# Altium PCB v1_long.PcbDoc (part 1 of 4)
Units mm, origin at the board's own origin, x right, y up, seen from the top; angles counter-clockwise.
Board outline 116.27 x 185.5 mm, 2 copper layers (Top Layer, Bottom Layer); 294 components, 195 nets, 982 pads, 413 vias.
Unrouted connection lines stored in the file: 3.
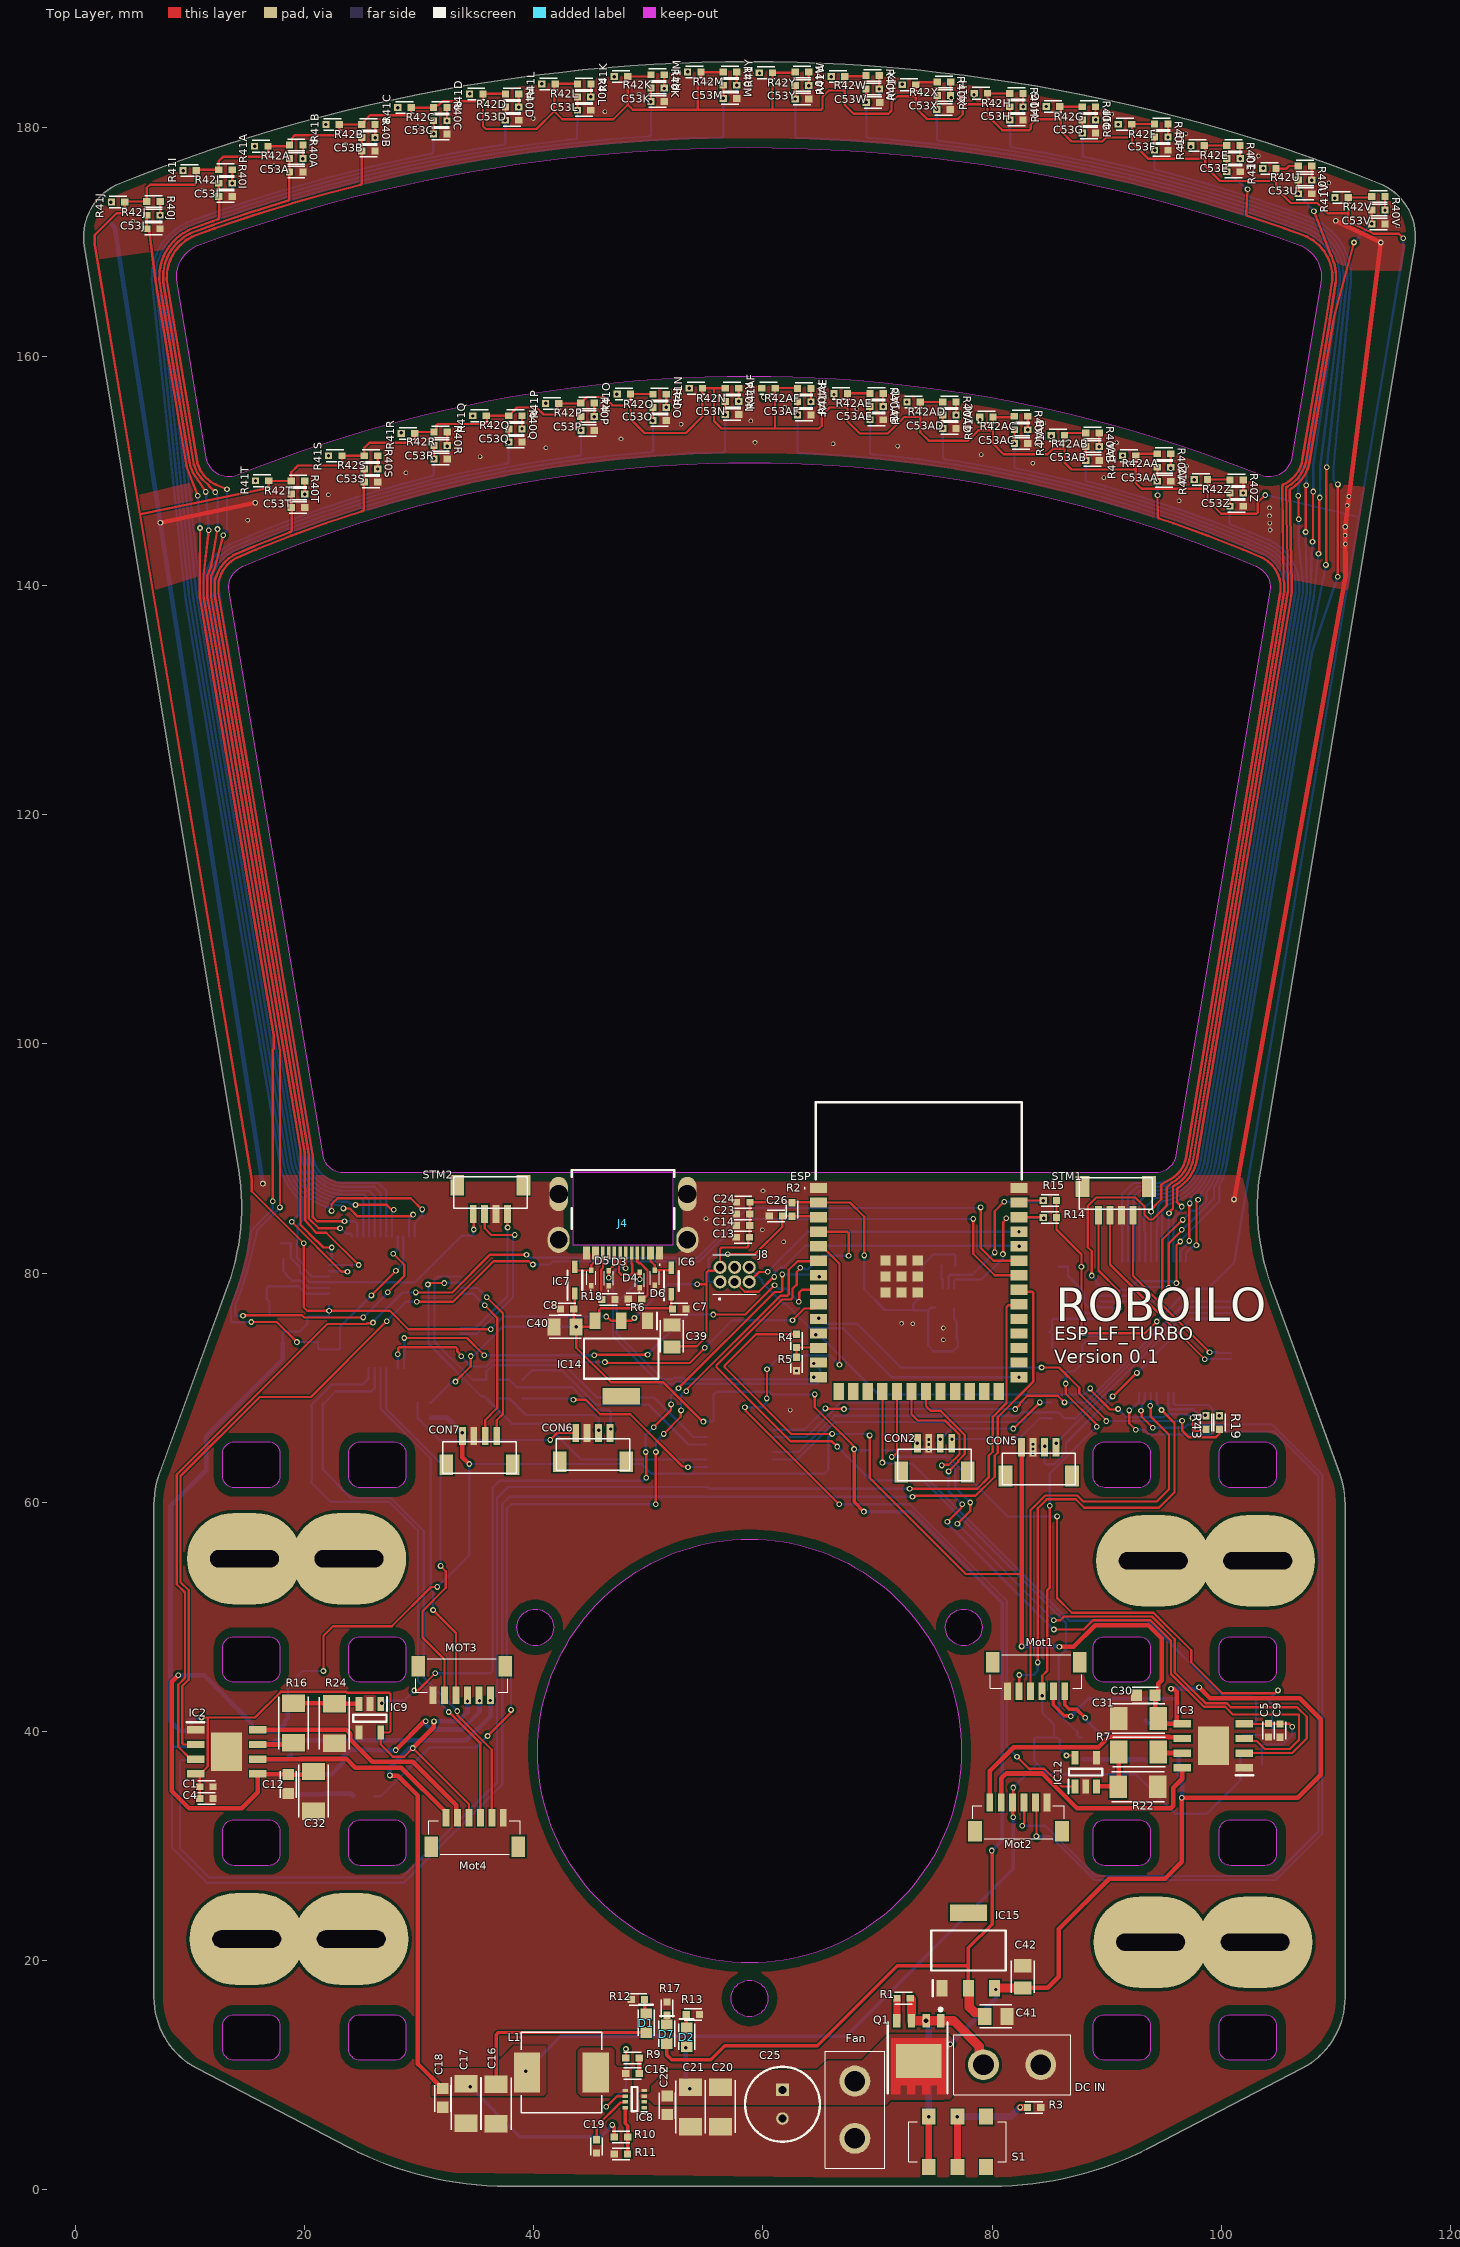
[diagram p0: Top Layer view]
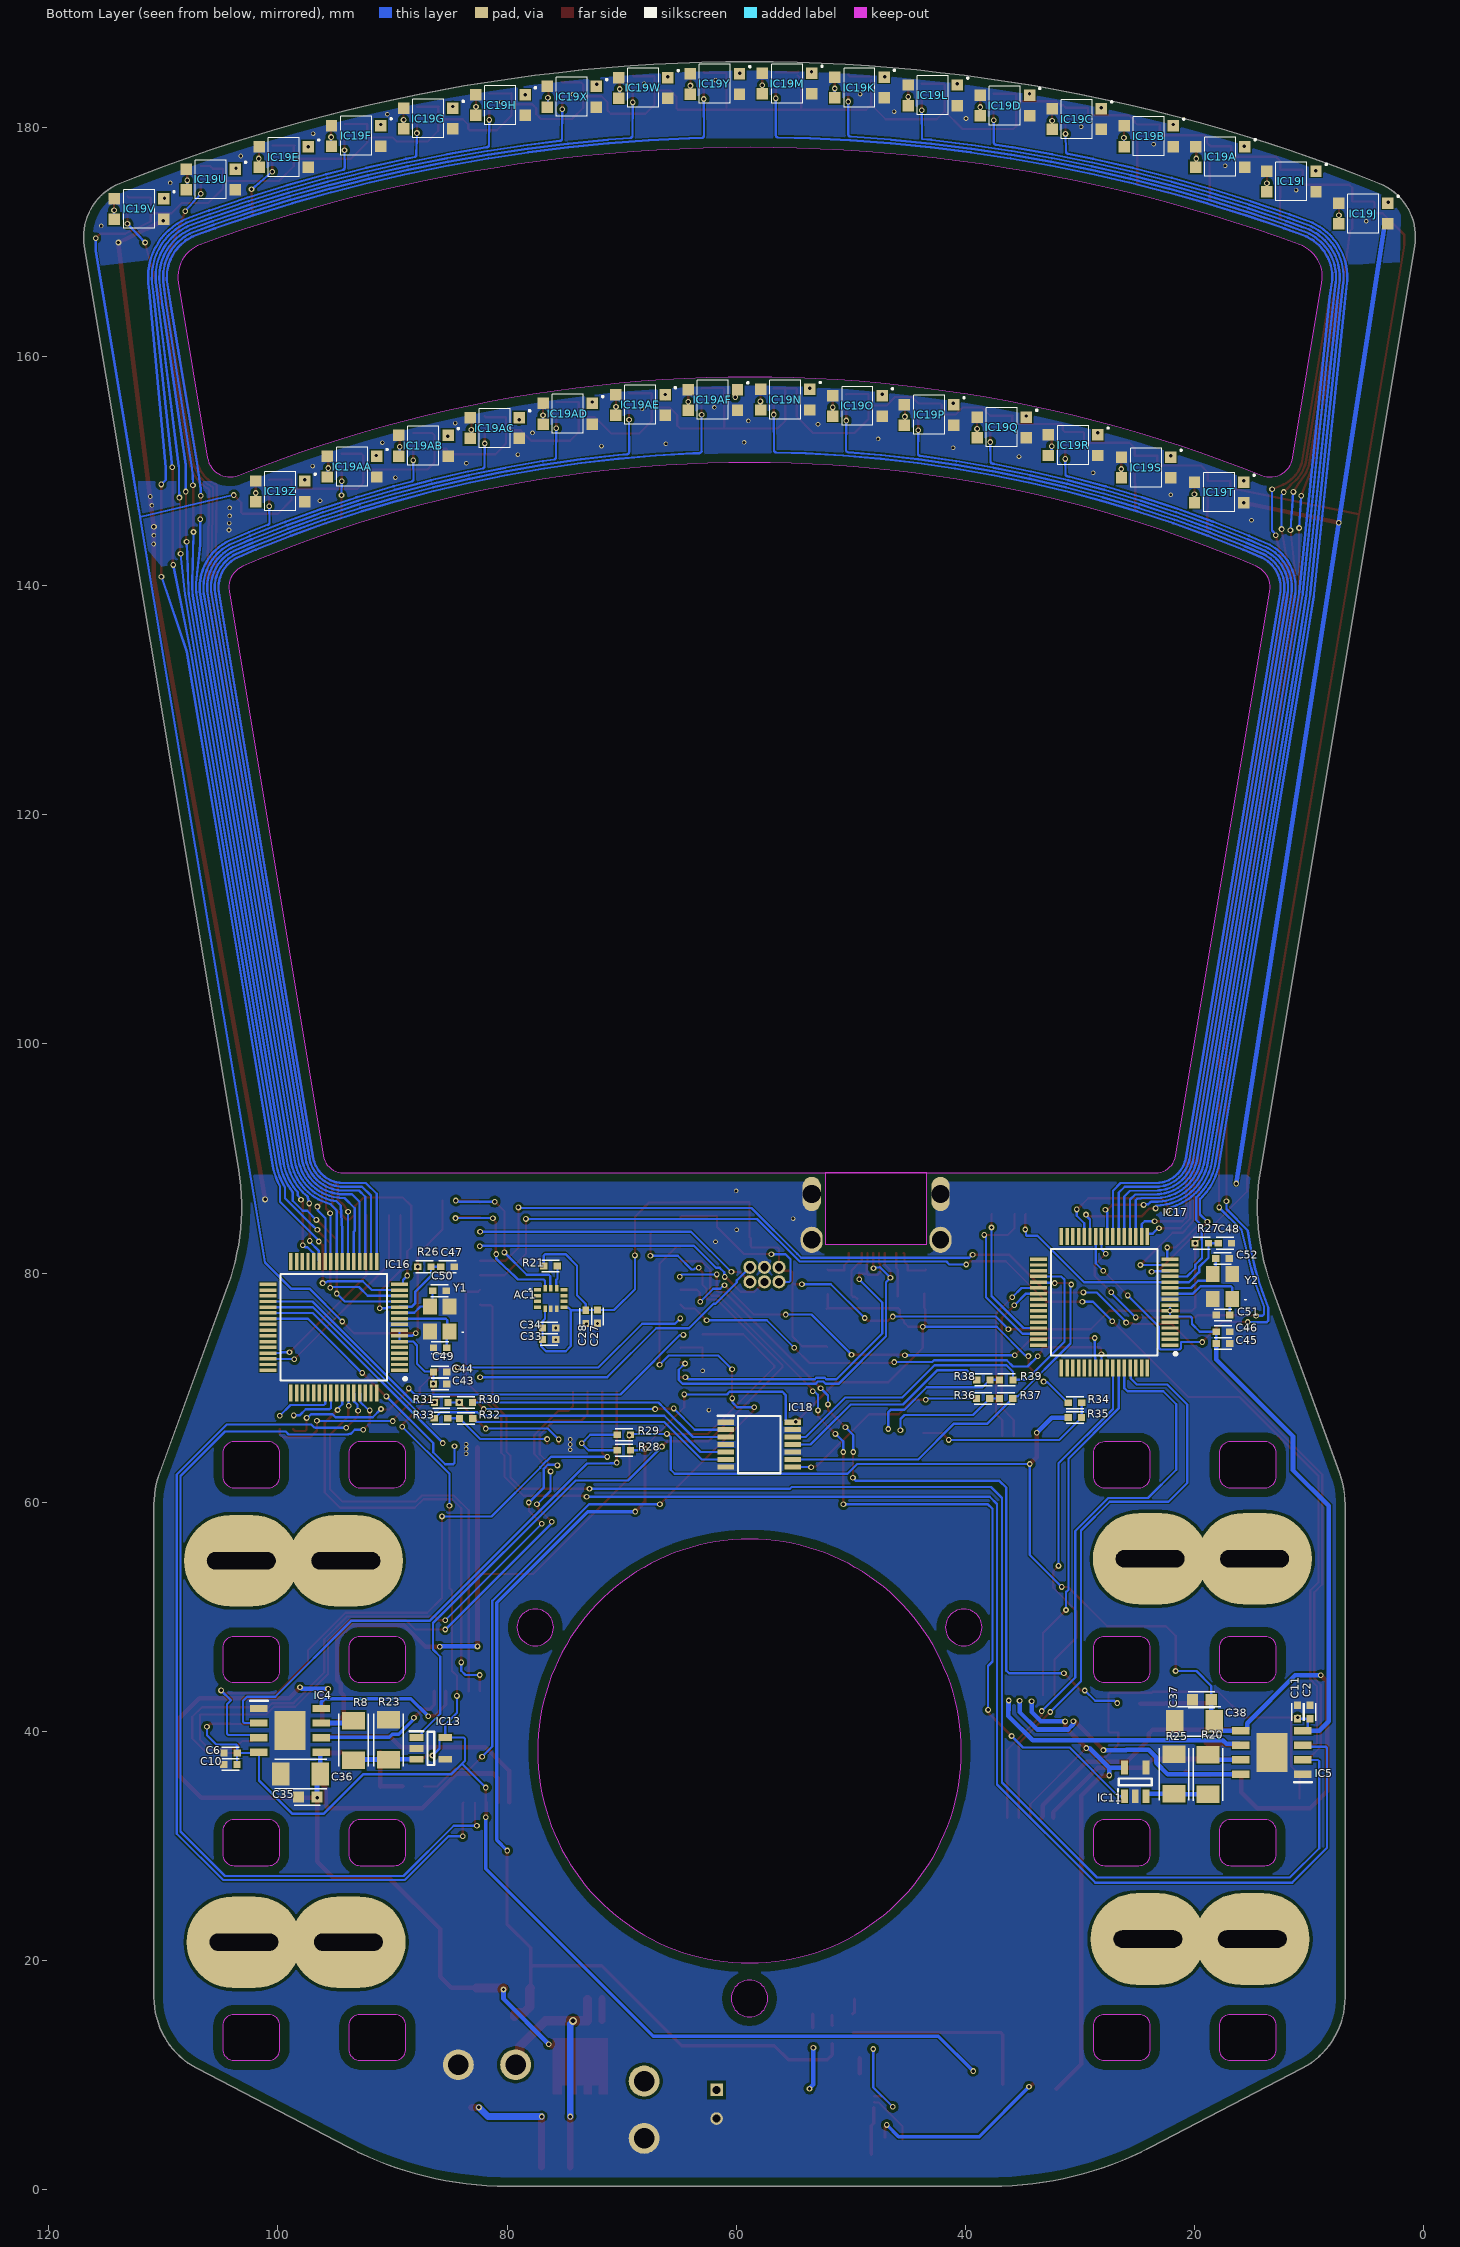
[diagram p1: Bottom Layer view, seen from below]
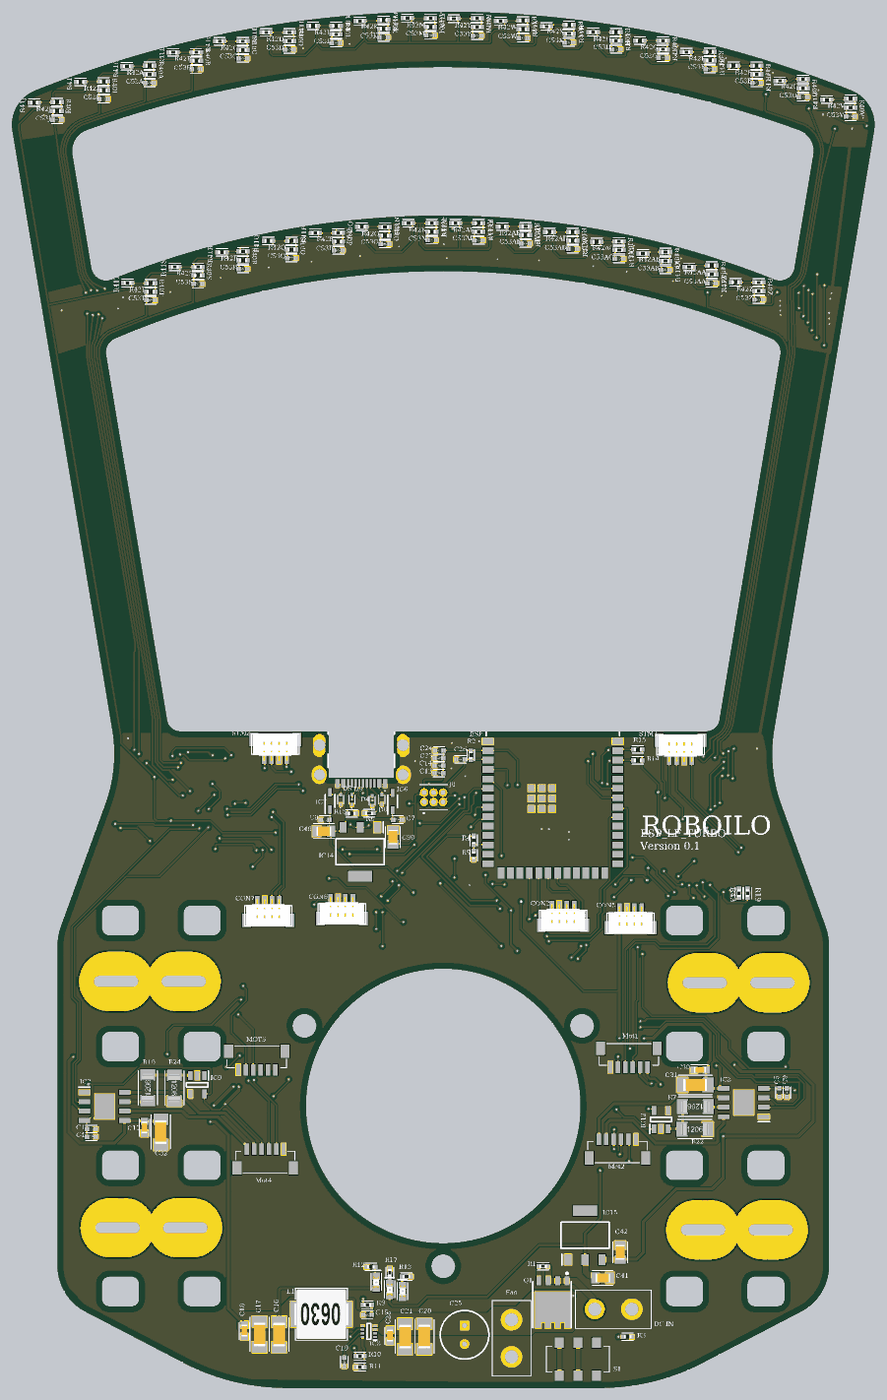
[diagram p5: 3D render of the assembled board from above, using the file's embedded part models]

## Layer stack, top to bottom
Top Solder: solder mask 0.0102, Solder Resist, Dk 3.5
Top Layer: signal copper 0.0356
Dielectric 1: dielectric 0.32, FR-4, Dk 4.8
Bottom Layer: signal copper 0.0356
Bottom Solder: solder mask 0.0102, Solder Resist, Dk 3.5

## Board outline
10.59,10.553 cw(c13.825,16.76) 6.825,16.76 6.825,59.76 cw(c14.825,59.76) 7.308,62.497 13.274,78.891 ccw(c-5.519,85.731) 14.208,89.022 0.758,169.66 cw(c5.689,170.483) 3.825,175.123 cw(c58.825,38.26) 113.825,175.123 cw(c111.961,170.483) 116.893,169.66 103.442,89.022 ccw(c123.169,85.731) 104.376,78.891 110.343,62.497 cw(c102.825,59.76) 110.825,59.76 110.825,16.76 cw(c103.825,16.76) 107.06,10.553 93.825,3.656 cw(c79.961,30.26) 79.961,0.26 37.689,0.26 cw(c37.689,30.26) 23.825,3.656
cut-out: 11.397,151.176 8.846,166.473 cw(c11.805,166.966) 10.777,169.784 cw(c58.777,38.27) 106.776,169.784 cw(c105.748,166.966) 108.707,166.473 106.156,151.176 cw(c104.183,151.505) 103.439,149.649 ccw(c58.777,38.27) 14.115,149.649 cw(c13.37,151.505)
cut-out: 21.606,90.256 13.388,139.524 cw(c15.361,139.853) 14.574,141.692 cw(c58.825,38.26) 103.076,141.692 cw(c102.289,139.853) 104.262,139.524 96.044,90.256 cw(c94.279,90.55) 94.279,88.76 23.371,88.76 cw(c23.371,90.55)
cut-out: 77.531,47.46 cw(c77.531,49.06) 75.931,49.06 cw(c77.531,49.06) 77.531,50.66 cw(c77.531,49.06) 79.131,49.06 cw(c77.531,49.06)
cut-out: 99.825,62.26 99.825,64.26 cw(c100.825,64.26) 100.825,65.26 103.825,65.26 cw(c103.825,64.26) 104.825,64.26 104.825,62.26 cw(c103.825,62.26) 103.825,61.26 100.825,61.26 cw(c100.825,62.26)
cut-out: 88.825,62.26 88.825,64.26 cw(c89.825,64.26) 89.825,65.26 92.825,65.26 cw(c92.825,64.26) 93.825,64.26 93.825,62.26 cw(c92.825,62.26) 92.825,61.26 89.825,61.26 cw(c89.825,62.26)
cut-out: 100.825,44.26 cw(c100.825,45.26) 99.825,45.26 99.825,47.26 cw(c100.825,47.26) 100.825,48.26 103.825,48.26 cw(c103.825,47.26) 104.825,47.26 104.825,45.26 cw(c103.825,45.26) 103.825,44.26
cut-out: 88.825,45.26 88.825,47.26 cw(c89.825,47.26) 89.825,48.26 92.825,48.26 cw(c92.825,47.26) 93.825,47.26 93.825,45.26 cw(c92.825,45.26) 92.825,44.26 89.825,44.26 cw(c89.825,45.26)
cut-out: 99.825,29.26 99.825,31.26 cw(c100.825,31.26) 100.825,32.26 103.825,32.26 cw(c103.825,31.26) 104.825,31.26 104.825,29.26 cw(c103.825,29.26) 103.825,28.26 100.825,28.26 cw(c100.825,29.26)
cut-out: 89.825,28.26 cw(c89.825,29.26) 88.825,29.26 88.825,31.26 cw(c89.825,31.26) 89.825,32.26 92.825,32.26 cw(c92.825,31.26) 93.825,31.26 93.825,29.26 cw(c92.825,29.26) 92.825,28.26
cut-out: 99.825,12.26 99.825,14.26 cw(c100.825,14.26) 100.825,15.26 103.825,15.26 cw(c103.825,14.26) 104.825,14.26 104.825,12.26 cw(c103.825,12.26) 103.825,11.26 100.825,11.26 cw(c100.825,12.26)
cut-out: 89.825,11.26 cw(c89.825,12.26) 88.825,12.26 88.825,14.26 cw(c89.825,14.26) 89.825,15.26 92.825,15.26 cw(c92.825,14.26) 93.825,14.26 93.825,12.26 cw(c92.825,12.26) 92.825,11.26
cut-out: 58.825,19.76 cw(c58.825,38.26) 40.325,38.26 cw(c58.825,38.26) 58.825,56.76 cw(c58.825,38.26) 77.325,38.26 cw(c58.825,38.26)
cut-out: 58.825,19.76 cw(c58.825,38.26) 40.325,38.26 cw(c58.825,38.26) 58.825,56.76 cw(c58.825,38.26) 77.325,38.26 cw(c58.825,38.26)
cut-out: 40.119,47.46 cw(c40.119,49.06) 38.519,49.06 cw(c40.119,49.06) 40.119,50.66 cw(c40.119,49.06) 41.719,49.06 cw(c40.119,49.06)
cut-out: 58.825,15.06 cw(c58.825,16.66) 57.225,16.66 cw(c58.825,16.66) 58.825,18.26 cw(c58.825,16.66) 60.425,16.66 cw(c58.825,16.66)
cut-out: 23.825,62.26 23.825,64.26 cw(c24.825,64.26) 24.825,65.26 27.825,65.26 cw(c27.825,64.26) 28.825,64.26 28.825,62.26 cw(c27.825,62.26) 27.825,61.26 24.825,61.26 cw(c24.825,62.26)
cut-out: 12.825,62.26 12.825,64.26 cw(c13.825,64.26) 13.825,65.26 16.825,65.26 cw(c16.825,64.26) 17.825,64.26 17.825,62.26 cw(c16.825,62.26) 16.825,61.26 13.825,61.26 cw(c13.825,62.26)
cut-out: 23.825,45.26 23.825,47.26 cw(c24.825,47.26) 24.825,48.26 27.825,48.26 cw(c27.825,47.26) 28.825,47.26 28.825,45.26 cw(c27.825,45.26) 27.825,44.26 24.825,44.26 cw(c24.825,45.26)
cut-out: 12.825,45.26 12.825,47.26 cw(c13.825,47.26) 13.825,48.26 16.825,48.26 cw(c16.825,47.26) 17.825,47.26 17.825,45.26 cw(c16.825,45.26) 16.825,44.26 13.825,44.26 cw(c13.825,45.26)
cut-out: 13.825,28.26 cw(c13.825,29.26) 12.825,29.26 12.825,31.26 cw(c13.825,31.26) 13.825,32.26 16.825,32.26 cw(c16.825,31.26) 17.825,31.26 17.825,29.26 cw(c16.825,29.26) 16.825,28.26
cut-out: 24.825,28.26 cw(c24.825,29.26) 23.825,29.26 23.825,31.26 cw(c24.825,31.26) 24.825,32.26 27.825,32.26 cw(c27.825,31.26) 28.825,31.26 28.825,29.26 cw(c27.825,29.26) 27.825,28.26
cut-out: 13.825,11.26 cw(c13.825,12.26) 12.825,12.26 12.825,14.26 cw(c13.825,14.26) 13.825,15.26 16.825,15.26 cw(c16.825,14.26) 17.825,14.26 17.825,12.26 cw(c16.825,12.26) 16.825,11.26
cut-out: 24.825,11.26 cw(c24.825,12.26) 23.825,12.26 23.825,14.26 cw(c24.825,14.26) 24.825,15.26 27.825,15.26 cw(c27.825,14.26) 28.825,14.26 28.825,12.26 cw(c27.825,12.26) 27.825,11.26
cut-out: 43.375,88.788 43.375,82.475 52.175,82.475 52.175,88.812

## Design rules (kind name [scope] priority, off if disabled: settings)
BoardOutlineClearance [All] p1: gap=0.8 ignorepadtopadclearanceinfootprint=FALSE
Clearance [All] p1: gap=0.127 ignorepadtopadclearanceinfootprint=TRUE except(0.2: Arc-THPad Track-THPad SMDPad-THPad; 0.254: THPad-Fill THPad-Poly THPad-Region Via-Fill Via-Poly Via-Region; 0.33: Arc-Hole Track-Hole SMDPad-Hole THPad-Hole Via-Hole Fill-Hole Poly-Hole Region-Hole; 0.5: THPad-THPad)
HoleSize [All] p1: absolutevalues=TRUE maxlimit=4 minlimit=0.02 maxpercent=80.000 minpercent=20.000
HoleToHoleClearance [All] p1: gap=0.127 allowstackedmicrovias=TRUE
PlaneClearance [All] p1: clearance=0.3
PlaneConnect PlaneConnect_1 [(HasFootprint('R 2512'))] p1: planeconnectstyle=Relief reliefexpansion=0.508 reliefentries=4 reliefconductorwidth=0.254 reliefairgap=0.254
PlaneConnect [All] p2: planeconnectstyle=Relief reliefexpansion=0.508 reliefentries=4 reliefconductorwidth=0.254 reliefairgap=0.254
PolygonConnect "Polygon Power Connection" [(HasFootprint('DFN 5x6')) OR  (HasFootprint('R 2512')) OR  IsVia OR  HasFootprint('SMD PAD')  OR  (HasFootprint('DJNR60454R5FERROCORE'))  OR  (HasFootprint ('SON50P200X200X80-9N-D')) OR (HasFootprint('SOT230P700X180-4N'))  OR    InNetClass('Power')] p1: connectstyle=Direct reliefconductorwidth=0.254 reliefentries=4 polygonreliefangle="90 Angle" airgapwidth=0.254 // Conection to high power components
PolygonConnect [All] p2: connectstyle=Direct reliefconductorwidth=0.254 reliefentries=4 polygonreliefangle="90 Angle" airgapwidth=0.254
RoutingVias [All] p1: holewidth=0.3 width=0.5 viastyle="Through Hole" minholewidth=0.2 minwidth=0.3 maxholewidth=1 maxwidth=1.27
SilkToSilkClearance [All] p1: silktosilkclearance=0.127
SolderMaskExpansion "Tented Vias" [IsVia] p1: expansion=0.102 istentingtop=TRUE
SolderMaskExpansion [All] p2: expansion=0.102 istentingtop=FALSE
Width [All] p1: maxlimit=1 minlimit=0.127 preferedwidth=0.3 minimp=50.000000 maximp=50.000000 favimp=50.000000
25 further rules are at their usual default settings.

## Classes and differential pairs
channel class Sensors: U_Sensors1 U_Sensors2 U_Sensors3 U_Sensors4 U_Sensors5 U_Sensors6 U_Sensors7 U_Sensors8 U_Sensors9 U_Sensors10 U_Sensors11 U_Sensors12 U_Sensors13 U_Sensors14 U_Sensors15 U_Sensors16 U_Sensors17 U_Sensors18 U_Sensors19 U_Sensors20 U_Sensors21 U_Sensors22 U_Sensors23 U_Sensors24 U_Sensors25 U_Sensors26 U_Sensors27 U_Sensors28 U_Sensors29 U_Sensors30 U_Sensors31 U_Sensors32
component class U_STM: C43 C44 C45 C46 C47 C48 C49 C50 C51 C52 CON1 CON3 IC16 IC17 R26 R27 Y1 Y2
component class U_STM-Interface: CON2 CON5 CON6 CON7 IC18 R28 R29 R30 R31 R32 R33 R34 R35 R36 R37 R38 R39
component class U_Sensors32: C53AF IC19AF R40AF R41AF R42AF
component class U_Sensors31: C53AE IC19AE R40AE R41AE R42AE
component class U_Sensors30: C53AD IC19AD R40AD R41AD R42AD
component class U_Sensors29: C53AC IC19AC R40AC R41AC R42AC
component class U_Sensors28: C53AB IC19AB R40AB R41AB R42AB
component class U_Sensors27: C53AA IC19AA R40AA R41AA R42AA
component class U_Sensors26: C53Z IC19Z R40Z R41Z R42Z
component class U_Sensors25: C53Y IC19Y R40Y R41Y R42Y
component class U_Sensors24: C53X IC19X R40X R41X R42X
component class U_Sensors23: C53W IC19W R40W R41W R42W
component class U_Sensors22: C53V IC19V R40V R41V R42V
component class U_Sensors21: C53U IC19U R40U R41U R42U
component class U_Sensors20: C53T IC19T R40T R41T R42T
component class U_Sensors19: C53S IC19S R40S R41S R42S
component class U_Sensors18: C53R IC19R R40R R41R R42R
component class U_Sensors17: C53Q IC19Q R40Q R41Q R42Q
component class U_Sensors16: C53P IC19P R40P R41P R42P
component class U_Sensors15: C53O IC19O R40O R41O R42O
component class U_Sensors14: C53N IC19N R40N R41N R42N
component class U_Sensors13: C53M IC19M R40M R41M R42M
component class U_Sensors12: C53L IC19L R40L R41L R42L
component class U_Sensors11: C53K IC19K R40K R41K R42K
component class U_Sensors10: C53J IC19J R40J R41J R42J
component class U_Sensors9: C53I IC19I R40I R41I R42I
component class U_Sensors8: C53H IC19H R40H R41H R42H
component class U_Sensors7: C53G IC19G R40G R41G R42G
component class U_Sensors6: C53F IC19F R40F R41F R42F
component class U_Sensors5: C53E IC19E R40E R41E R42E
component class U_Sensors4: C53D IC19D R40D R41D R42D
component class U_Sensors3: C53C IC19C R40C R41C R42C
component class U_Sensors2: C53B IC19B R40B R41B R42B
component class U_Sensors1: C53A IC19A R40A R41A R42A
component class U_Power-line: C15 C16 C17 C18 C19 C20 C21 C22 C25 C39 C40 C41 C42 IC8 IC14 IC15 J3 J5 L1 Q1 R1 R3 R9 R10 R11 S1
component class U_IMU: AC1 C27 C28 C33 C34 R21
component class U_ESP: "  " C13 C14 C23 C24 C26 D1 D2 D7 IC1 R2 R4 R5 R12 R13 R14 R15 R17 R19
component class U_ESP-Interface: C7 C8 D3 D4 D5 D6 IC6 IC7 J4 J8 R6 R18
component class U_Drivers: C1 C2 C4 C5 C6 C9 C10 C11 C12 C30 C31 C32 C35 C36 C37 C38 IC2 IC3 IC4 IC5 IC9 IC11 IC12 IC13 J1 J2 J6 J7 R7 R8 R16 R20 R22 R23 R24 R25

## Components (designator, comment, footprint, x,y, rotation, side; value= is the part's Value field where it differs from the comment)
AC1 "LSM6DSOXTR" LGA-14_1 76.175,77.775 r180 bottom
C1 "100nF" "C 0402" 11.4,35.15 r0 top
C2 "100nF" "C 0402" 9.9,41.666 r90 bottom
C4 "100nF" "C 0402" 11.4,34.125 r0 top
C5 "100nF" "C 0402" 104.125,40.075 r270 top
C6 "100nF" "C 0402" 104.125,38.1 r0 bottom
C7 "10uF" "C 0402" 52.684,76.85 r0 top
C8 "10uF" "C 0402" 42.9,76.85 r180 top
C9 "100nF" "C 0402" 105.15,40.05 r270 top
C10 "100nF" "C 0402" 104.15,37.1 r0 bottom
C11 "100nF" "C 0402" 10.975,41.666 r90 bottom
C12 "0.1uF" "C 0603" 18.55,35.387 r270 top
C13 "1uF" "C 0402" 58.241,83.125 r180 top
C14 "100nF" "C 0402" 58.25,84.15 r180 top
C15 "100nF" "C 0402" 48.6,10.125 r180 top
C16 "40uF" "C 1206" 36.7,7.45 r270 top
C17 "40uF" "C 1206" 34.075,7.475 r270 top
C18 "100nF" "C 0603" 32.025,7.975 r270 top
C19 "33nF" "C 0402" 45.475,3.75 r270 top
C20 "10uF" "C 1206" 56.275,7.2 r270 top
C21 "10uF" "C 1206" 53.675,7.175 r270 top
C22 "100nF" "C 0603" 51.65,7.325 r270 top
C23 "10uF" "C 0402" 58.25,85.15 r180 top
C24 "22uF" "C 0402" 58.275,86.175 r180 top
C25 "UVY1V101MED1TD" CAPPRD250W50D655H1250 61.7,8.675 r270 top
C26 "1uF" "C 0402" 61.125,84.975 r180 top
C27 "100nF" "C 0402" 72.1,76.191 r270 bottom
C28 "1uF" "C 0402" 73.125,76.175 r270 bottom
C30 "0.1uF" "C 0603" 93.425,43.125 r180 top
C31 "47uF" "C 1206" 92.775,41.1 r180 top
C32 "47uF" "C 1206" 20.75,34.75 r270 top
C33 "1uF" "C 0402" 76.325,74.2 r180 bottom
C34 "100nF" "C 0402" 76.325,75.2 r180 bottom
C35 "0.1uF" "C 0603" 97.4,34.25 r0 bottom
C36 "47uF" "C 1206" 98.025,36.25 r0 bottom
C37 "0.1uF" "C 0603" 19.325,42.725 r0 bottom
C38 "47uF" "C 1206" 19.975,40.85 r0 bottom
C39 "22uF" "C 0805" 52.05,74.5 r90 top
C40 "10uF" "C 0805" 42.725,75.3 r180 top
C41 "22uF" "C 0805" 80.325,15.1 r0 top
C42 "10uF" "C 0805" 82.675,18.55 r90 top
C43 "1uF" "C 0402" 85.841,70.325 r180 bottom
C44 "100nF" "C 0402" 85.841,71.35 r180 bottom
C45 "1uF" "C 0402" 17.491,73.85 r180 bottom
C46 "100nF" "C 0402" 17.491,74.875 r180 bottom
C47 "100nF" "C 0402" 85.191,80.55 r180 bottom
C48 "100nF" "C 0402" 17.325,82.6 r180 bottom
C49 "22pF" "C 0402" 85.841,73.475 r0 bottom
C50 "22pF" "C 0402" 85.9,78.45 r180 bottom
C51 "22pF" "C 0402" 17.491,76.35 r0 bottom
C52 "22pF" "C 0402" 17.525,81.275 r180 bottom
C53A "22nF" "C 0402" 19.25,176.125 r0 top (schematic designator C53)
C53AA "22nF" "C 0402" 95.009,149.125 r0 top (schematic designator C53)
C53AB "22nF" "C 0402" 88.775,150.95 r0 top (schematic designator C53)
C53AC "22nF" "C 0402" 82.534,152.425 r0 top (schematic designator C53)
C53AD "22nF" "C 0402" 76.275,153.75 r0 top (schematic designator C53)
C53AE "22nF" "C 0402" 69.925,154.5 r0 top (schematic designator C53)
C53AF "22nF" "C 0402" 63.6,154.925 r0 top (schematic designator C53)
C53B "22nF" "C 0402" 25.55,177.975 r0 top (schematic designator C53)
C53C "22nF" "C 0402" 31.825,179.45 r0 top (schematic designator C53)
C53D "22nF" "C 0402" 38.091,180.65 r0 top (schematic designator C53)
C53E "22nF" "C 0402" 101.075,176.15 r0 top (schematic designator C53)
C53F "22nF" "C 0402" 94.775,178.025 r0 top (schematic designator C53)
C53G "22nF" "C 0402" 88.45,179.525 r0 top (schematic designator C53)
C53H "22nF" "C 0402" 82.125,180.675 r0 top (schematic designator C53)
C53I "22nF" "C 0402" 13.066,173.975 r0 top (schematic designator C53)
C53J "22nF" "C 0402" 6.775,171.175 r0 top (schematic designator C53)
C53K "22nF" "C 0402" 50.8,182.275 r0 top (schematic designator C53)
C53L "22nF" "C 0402" 44.384,181.525 r0 top (schematic designator C53)
C53M "22nF" "C 0402" 57.125,182.55 r0 top (schematic designator C53)
C53N "22nF" "C 0402" 57.291,154.95 r0 top (schematic designator C53)
C53O "22nF" "C 0402" 50.975,154.425 r0 top (schematic designator C53)
C53P "22nF" "C 0402" 44.691,153.575 r0 top (schematic designator C53)
C53Q "22nF" "C 0402" 38.384,152.55 r0 top (schematic designator C53)
C53R "22nF" "C 0402" 31.85,151.075 r0 top (schematic designator C53)
C53S "22nF" "C 0402" 25.775,149.05 r0 top (schematic designator C53)
C53T "22nF" "C 0402" 19.4,146.85 r0 top (schematic designator C53)
C53U "22nF" "C 0402" 107.325,174.225 r0 top (schematic designator C53)
C53V "22nF" "C 0402" 113.725,171.6 r0 top (schematic designator C53)
C53W "22nF" "C 0402" 69.6,182.2 r0 top (schematic designator C53)
C53X "22nF" "C 0402" 75.766,181.6 r0 top (schematic designator C53)
C53Y "22nF" "C 0402" 63.4,182.5 r0 top (schematic designator C53)
C53Z "22nF" "C 0402" 101.35,146.95 r0 top (schematic designator C53)
CON2 "4 PIN" BM04B-SRSS-TB 74.975,63.625 r180 top
CON5 "4 PIN" BM04B-SRSS-TB 84.075,63.275 r180 top
CON6 "4 PIN" BM04B-SRSS-TB 45.15,64.525 r180 top
CON7 "4 PIN" BM04B-SRSS-TB 35.25,64.275 r180 top
D1 "LED BLUE" "LED 0603 BLUE" 49.8,14.5 r90 top
D2 "LED BLUE" "LED 0603 BLUE" 53.325,13.275 r90 top
D3 "LESD5D5.0CT1G" LESD5D50CT1G 46.525,79.535 r90 top
D4 "LESD5D5.0CT1G" LESD5D50CT1G 49.25,79.385 r90 top
D5 "LESD5D5.0CT1G" LESD5D50CT1G 45,79.56 r90 top
D6 "LESD5D5.0CT1G" LESD5D50CT1G 50.55,79.575 r90 top
D7 "LED BLUE" "LED 0603 BLUE" 51.6,13.525 r90 top
"DC IN" "XT30PB" XT30PB 84.25,10.875 r270 top (schematic designator J5)
ESP "ESP32-S3-WROOM-1-N16R8" ESP32S3WROOM1N16R8 73.6,82.16 r0 top (schematic designator IC1)
Fan "XT30PB" XT30PB 68.025,4.45 r180 top (schematic designator J3)
IC2 "DRV8251DDAR" SOIC127P600X170-9N 13.175,38.2 r0 top
IC3 "DRV8251DDAR" SOIC127P600X170-9N 99.325,38.725 r180 top
IC4 "DRV8251DDAR" SOIC127P600X170-9N 98.95,40.075 r180 bottom
IC5 "DRV8251DDAR" SOIC127P600X170-9N 13.225,38.125 r0 bottom
IC6 "BAT760-7" SOD2513X120N 52,79.3 r90 top
IC7 "BAT760-7" SOD2513X120N 43.575,79.375 r90 top
IC8 "TPS62933DRLR" SOTFL50P160X60-8N 48.8,7.875 r180 top
IC9 "INA180A2IDBVR" SOT95P280X145-5N 25.675,41.125 r270 top
IC11 "INA180A2IDBVR" SOT95P280X145-5N 25.15,35.575 r90 bottom
IC12 "INA180A2IDBVR" SOT95P280X145-5N 88.175,36.425 r90 top
IC13 "INA180A2IDBVR" SOT95P280X145-5N 86.65,38.5 r180 bottom
IC14 "AMS1117-3.3" SOT229P700X180-4N 47.625,72.525 r270 top
IC15 "AMS1117-5" SOT229P700X180-4N 77.935,20.85 r90 top
IC16 "STM32G070RBT6" QFP50P1200X1200X160-64N 95.125,75.262 r0 bottom
IC17 "STM32G070RBT6" QFP50P1200X1200X160-64N 27.85,77.45 r0 bottom
IC18 "MC74HCT125ADTR2G" SOP65P640X120-14N 57.975,65.025 r180 bottom
IC19A "KTIR0711S" KTIR0711S 17.725,177.45 r0 bottom (schematic designator IC19)
IC19AA "KTIR0711S" KTIR0711S 93.525,150.4 r0 bottom (schematic designator IC19)
IC19AB "KTIR0711S" KTIR0711S 87.3,152.225 r0 bottom (schematic designator IC19)
IC19AC "KTIR0711S" KTIR0711S 81.073,153.775 r0 bottom (schematic designator IC19)
IC19AD "KTIR0711S" KTIR0711S 74.7,155.025 r0 bottom (schematic designator IC19)
IC19AE "KTIR0711S" KTIR0711S 68.35,155.8 r0 bottom (schematic designator IC19)
IC19AF "KTIR0711S" KTIR0711S 62.025,156.225 r0 bottom (schematic designator IC19)
IC19B "KTIR0711S" KTIR0711S 23.975,179.25 r0 bottom (schematic designator IC19)
IC19C "KTIR0711S" KTIR0711S 30.25,180.75 r0 bottom (schematic designator IC19)
IC19D "KTIR0711S" KTIR0711S 36.525,181.925 r0 bottom (schematic designator IC19)
IC19E "KTIR0711S" KTIR0711S 99.5,177.425 r0 bottom (schematic designator IC19)
IC19F "KTIR0711S" KTIR0711S 93.175,179.275 r0 bottom (schematic designator IC19)
IC19G "KTIR0711S" KTIR0711S 86.875,180.8 r0 bottom (schematic designator IC19)
IC19H "KTIR0711S" KTIR0711S 80.573,181.975 r0 bottom (schematic designator IC19)
IC19I "KTIR0711S" KTIR0711S 11.516,175.3 r0 bottom (schematic designator IC19)
IC19J "KTIR0711S" KTIR0711S 5.25,172.5 r0 bottom (schematic designator IC19)
IC19K "KTIR0711S" KTIR0711S 49.225,183.5 r0 bottom (schematic designator IC19)
IC19L "KTIR0711S" KTIR0711S 42.825,182.825 r0 bottom (schematic designator IC19)
IC19M "KTIR0711S" KTIR0711S 55.55,183.85 r0 bottom (schematic designator IC19)
IC19N "KTIR0711S" KTIR0711S 55.716,156.25 r0 bottom (schematic designator IC19)
IC19O "KTIR0711S" KTIR0711S 49.4,155.7 r0 bottom (schematic designator IC19)
IC19P "KTIR0711S" KTIR0711S 43.15,154.925 r0 bottom (schematic designator IC19)
IC19Q "KTIR0711S" KTIR0711S 36.8,153.825 r0 bottom (schematic designator IC19)
IC19R "KTIR0711S" KTIR0711S 30.575,152.275 r0 bottom (schematic designator IC19)
IC19S "KTIR0711S" KTIR0711S 24.2,150.325 r0 bottom (schematic designator IC19)
IC19T "KTIR0711S" KTIR0711S 17.825,148.15 r0 bottom (schematic designator IC19)
IC19U "KTIR0711S" KTIR0711S 105.875,175.475 r0 bottom (schematic designator IC19)
IC19V "KTIR0711S" KTIR0711S 112.125,172.9 r0 bottom (schematic designator IC19)
IC19W "KTIR0711S" KTIR0711S 68.1,183.475 r0 bottom (schematic designator IC19)
IC19X "KTIR0711S" KTIR0711S 74.35,182.7 r0 bottom (schematic designator IC19)
IC19Y "KTIR0711S" KTIR0711S 61.85,183.825 r0 bottom (schematic designator IC19)
IC19Z "KTIR0711S" KTIR0711S 99.8,148.25 r0 bottom (schematic designator IC19)
J4 "USB4500-03-0-A" USB4500030A 47.775,85.75 r180 top
J8 "FTSH-103-01-F-D" FTSH-103-XX-YYY-D 56.255,79.23 r0 top
L1 "4.7uH" HPI0630 42.4,10.2 r180 top
Mot1 "BM06B-SRSS-TB_LF__SN_" BM06BSRSSTBLFSN 83.85,45.075 r180 top (schematic designator J7)
Mot2 "BM06B-SRSS-TB_LF__SN_" BM06BSRSSTBLFSN 82.3,32.187 r0 top (schematic designator J6)
MOT3 "BM06B-SRSS-TB_LF__SN_" BM06BSRSSTBLFSN 33.7,44.725 r180 top (schematic designator J2)
Mot4 "BM06B-SRSS-TB_LF__SN_" BM06BSRSSTBLFSN 34.825,30.85 r0 top (schematic designator J1)
Q1 "AON6403" "DFN 5x6" 73.6,11.8 r180 top
R1 "100k" "R 0402" 72.275,16.675 r0 top
R2 "10k" "R 0402" 62.525,85.541 r90 top
R3 "1k" "R 0402" 83.675,7.15 r180 top
R4 "47k" "R 0402" 62.925,74.075 r90 top
R5 "13k" "R 0402" 62.925,72.05 r90 top
R6 "10k" "R 0402" 48.825,77.725 r0 top
R7 "0.05R" "R 1206" 92.8,38.175 r180 top
R8 "0.05R" "R 1206" 93.4,39.2 r270 bottom
R9 "0" "R 0402" 48.6,11.45 r180 top
R10 "31.3K" "R 0402" 47.6,4.55 r0 top
R11 "10K" "R 0402" 47.591,3.075 r0 top
R12 "160" "R 0402" 49.075,16.575 r0 top
R13 "160" "R 0402" 53.875,15.275 r180 top
R14 "10k" "R 0402" 85.05,84.85 r0 top
R15 "10k" "R 0402" 85.05,86.325 r0 top
R16 "0.05R" "R 1206" 19,40.727 r90 top
R17 "160" "R 0402" 51.625,15.775 r270 top
R18 "10k" "R 0402" 46.5,77.7 r180 top
R19 "0" "R 0402" 99.85,66.95 r90 top
R20 "0.05R" "R 1206" 18.8,36.202 r270 bottom
R21 "0R" "R 0402" 76.2,80.625 r0 bottom
R22 "0.05R" "R 1206" 92.75,35.15 r0 top
R23 "0.05R" "R 1206" 90.35,39.25 r90 bottom
R24 "0.05R" "R 1206" 22.575,40.677 r270 top
R25 "0.05R" "R 1206" 21.775,36.25 r90 bottom
R26 "100k" "R 0402" 87.216,80.55 r0 bottom
R27 "100k" "R 0402" 19.341,82.6 r0 bottom
R28 "0" "R 0402" 69.8,64.525 r180 bottom
R29 "0" "R 0402" 69.8,65.875 r180 bottom
R30 "0" "R 0402" 83.591,68.7 r180 bottom
R31 "0" "R 0402" 85.741,68.7 r0 bottom
R32 "0" "R 0402" 83.566,67.3 r180 bottom
R33 "0" "R 0402" 85.766,67.325 r0 bottom
R34 "0" "R 0402" 30.416,68.675 r0 bottom
R35 "0" "R 0402" 30.419,67.372 r0 bottom
R36 "0" "R 0402" 38.425,69.05 r0 bottom
R37 "0" "R 0402" 36.425,69.05 r180 bottom
R38 "0" "R 0402" 38.409,70.675 r0 bottom
R39 "0" "R 0402" 36.409,70.675 r180 bottom
R40A "10k" "R 0402" 19.25,178.475 r180 top (schematic designator R40)
R40AA "10k" "R 0402" 95.016,151.525 r180 top (schematic designator R40)
R40AB "10k" "R 0402" 88.775,153.35 r180 top (schematic designator R40)
R40AC "10k" "R 0402" 82.525,154.8 r180 top (schematic designator R40)
R40AD "10k" "R 0402" 76.275,156.05 r180 top (schematic designator R40)
R40AE "10k" "R 0402" 69.925,156.8 r180 top (schematic designator R40)
R40AF "10k" "R 0402" 63.6,157.225 r180 top (schematic designator R40)
R40B "10k" "R 0402" 25.55,180.275 r180 top (schematic designator R40)
R40C "10k" "R 0402" 31.825,181.75 r180 top (schematic designator R40)
R40D "10k" "R 0402" 38.1,182.95 r180 top (schematic designator R40)
R40E "10k" "R 0402" 101.066,178.45 r180 top (schematic designator R40)
R40F "10k" "R 0402" 94.775,180.325 r180 top (schematic designator R40)
R40G "10k" "R 0402" 88.45,181.825 r180 top (schematic designator R40)
R40H "10k" "R 0402" 82.125,182.975 r180 top (schematic designator R40)
R40I "10k" "R 0402" 13.066,176.325 r180 top (schematic designator R40)
R40J "10k" "R 0402" 6.784,173.55 r180 top (schematic designator R40)
R40K "10k" "R 0402" 50.8,184.625 r180 top (schematic designator R40)
R40L "10k" "R 0402" 44.391,183.825 r180 top (schematic designator R40)
R40M "10k" "R 0402" 57.125,184.85 r180 top (schematic designator R40)
R40N "10k" "R 0402" 57.291,157.25 r180 top (schematic designator R40)
R40O "10k" "R 0402" 50.975,156.725 r180 top (schematic designator R40)
R40P "10k" "R 0402" 44.675,155.95 r180 top (schematic designator R40)
R40Q "10k" "R 0402" 38.375,154.85 r180 top (schematic designator R40)
R40R "10k" "R 0402" 31.85,153.425 r180 top (schematic designator R40)
R40S "10k" "R 0402" 25.775,151.35 r180 top (schematic designator R40)
R40T "10k" "R 0402" 19.4,149.15 r180 top (schematic designator R40)
R40U "10k" "R 0402" 107.325,176.65 r180 top (schematic designator R40)
R40V "10k" "R 0402" 113.725,174 r180 top (schematic designator R40)
R40W "10k" "R 0402" 69.575,184.55 r180 top (schematic designator R40)
R40X "10k" "R 0402" 75.8,183.975 r180 top (schematic designator R40)
R40Y "10k" "R 0402" 63.4,184.85 r180 top (schematic designator R40)
R40Z "10k" "R 0402" 101.35,149.25 r180 top (schematic designator R40)
R41A "120R" "R 0402" 16.191,178.375 r180 top (schematic designator R41)
R41AA "120R" "R 0402" 91.966,151.35 r180 top (schematic designator R41)
R41AB "120R" "R 0402" 85.741,153.15 r180 top (schematic designator R41)
R41AC "120R" "R 0402" 79.5,154.725 r180 top (schematic designator R41)
R41AD "120R" "R 0402" 73.15,156.05 r180 top (schematic designator R41)
R41AE "120R" "R 0402" 66.791,156.775 r180 top (schematic designator R41)
R41AF "120R" "R 0402" 60.475,157.25 r180 top (schematic designator R41)
R41B "120R" "R 0402" 22.425,180.275 r180 top (schematic designator R41)
R41C "120R" "R 0402" 28.7,181.75 r180 top (schematic designator R41)
R41D "120R" "R 0402" 34.966,182.95 r180 top (schematic designator R41)
R41E "120R" "R 0402" 97.95,178.45 r180 top (schematic designator R41)
R41F "120R" "R 0402" 91.6,180.3 r180 top (schematic designator R41)
R41G "120R" "R 0402" 85.325,181.85 r180 top (schematic designator R41)
R41H "120R" "R 0402" 79.025,183 r180 top (schematic designator R41)
R41I "120R" "R 0402" 9.941,176.275 r180 top (schematic designator R41)
R41J "120R" "R 0402" 3.7,173.5 r180 top (schematic designator R41)
R41K "120R" "R 0402" 47.6,184.475 r180 top (schematic designator R41)
R41L "120R" "R 0402" 41.275,183.825 r180 top (schematic designator R41)
R41M "120R" "R 0402" 54,184.875 r180 top (schematic designator R41)
R41N "120R" "R 0402" 54.141,157.25 r180 top (schematic designator R41)
R41O "120R" "R 0402" 47.85,156.75 r180 top (schematic designator R41)
R41P "120R" "R 0402" 41.591,155.925 r180 top (schematic designator R41)
R41Q "120R" "R 0402" 35.25,154.85 r180 top (schematic designator R41)
R41R "120R" "R 0402" 29,153.3 r180 top (schematic designator R41)
R41S "120R" "R 0402" 22.65,151.35 r180 top (schematic designator R41)
R41T "120R" "R 0402" 16.275,149.175 r180 top (schematic designator R41)
R41U "120R" "R 0402" 104.216,176.425 r180 top (schematic designator R41)
R41V "120R" "R 0402" 110.525,173.9 r180 top (schematic designator R41)
R41W "120R" "R 0402" 66.55,184.475 r180 top (schematic designator R41)
R41X "120R" "R 0402" 72.75,183.75 r180 top (schematic designator R41)
R41Y "120R" "R 0402" 60.25,184.8 r180 top (schematic designator R41)
R41Z "120R" "R 0402" 98.225,149.275 r180 top (schematic designator R41)
R42A "8k" "R 0402" 19.25,177.3 r0 top (schematic designator R42)
R42AA "8k" "R 0402" 95.016,150.35 r0 top (schematic designator R42)
R42AB "8k" "R 0402" 88.775,152.15 r0 top (schematic designator R42)
R42AC "8k" "R 0402" 82.534,153.625 r0 top (schematic designator R42)
R42AD "8k" "R 0402" 76.275,154.9 r0 top (schematic designator R42)
R42AE "8k" "R 0402" 69.916,155.65 r0 top (schematic designator R42)
R42AF "8k" "R 0402" 63.6,156.075 r0 top (schematic designator R42)
R42B "8k" "R 0402" 25.55,179.125 r0 top (schematic designator R42)
R42C "8k" "R 0402" 31.825,180.6 r0 top (schematic designator R42)
R42D "8k" "R 0402" 38.1,181.8 r0 top (schematic designator R42)
R42E "8k" "R 0402" 101.075,177.3 r0 top (schematic designator R42)
R42F "8k" "R 0402" 94.775,179.175 r0 top (schematic designator R42)
R42G "8k" "R 0402" 88.45,180.675 r0 top (schematic designator R42)
R42H "8k" "R 0402" 82.125,181.825 r0 top (schematic designator R42)
R42I "8k" "R 0402" 13.066,175.15 r0 top (schematic designator R42)
R42J "8k" "R 0402" 6.775,172.35 r0 top (schematic designator R42)
R42K "8k" "R 0402" 50.8,183.45 r0 top (schematic designator R42)
R42L "8k" "R 0402" 44.384,182.675 r0 top (schematic designator R42)
R42M "8k" "R 0402" 57.125,183.7 r0 top (schematic designator R42)
R42N "8k" "R 0402" 57.291,156.1 r0 top (schematic designator R42)
R42O "8k" "R 0402" 50.975,155.575 r0 top (schematic designator R42)
R42P "8k" "R 0402" 44.675,154.775 r0 top (schematic designator R42)
R42Q "8k" "R 0402" 38.375,153.7 r0 top (schematic designator R42)
R42R "8k" "R 0402" 31.85,152.25 r0 top (schematic designator R42)
R42S "8k" "R 0402" 25.775,150.2 r0 top (schematic designator R42)
R42T "8k" "R 0402" 19.4,148 r0 top (schematic designator R42)
R42U "8k" "R 0402" 107.325,175.425 r0 top (schematic designator R42)
R42V "8k" "R 0402" 113.725,172.8 r0 top (schematic designator R42)
R42W "8k" "R 0402" 69.575,183.375 r0 top (schematic designator R42)
R42X "8k" "R 0402" 75.791,182.8 r0 top (schematic designator R42)
R42Y "8k" "R 0402" 63.4,183.675 r0 top (schematic designator R42)
R42Z "8k" "R 0402" 101.35,148.1 r0 top (schematic designator R42)
R43 "0" "R 0402" 98.675,66.95 r90 top
S1 "CL-SB-22B-01T" CLSB22B01T 76.975,4.15 r0 top
STM1 "4 PIN" BM04B-SRSS-TB 90.8,86.55 r0 top (schematic designator CON1)
STM2 "4 PIN" BM04B-SRSS-TB 36.2,86.65 r0 top (schematic designator CON3)
Y1 "MCSJK-7U-16.00-12-30-80-B-30" MCSJK7U1600123080B30 85.875,75.975 r90 bottom
Y2 "MCSJK-7U-16.00-12-30-80-B-30" MCSJK7U1600123080B30 17.525,78.825 r90 bottom

## Footprints (in the part's own frame and the unit in brackets; to place one, negate y for a bottom-side part, rotate by r counter-clockwise, add the part's x,y. Pads: shape width x height; smd on the part's side, far side on the other; paste and mask are expansions set on the pad)
BM04B-SRSS-TB [mm]
  rect 0.6x1.6 smd: 1(-1.5,-1.5) 2(-0.5,-1.5) 3(0.5,-1.5) 4(1.5,-1.5)
  rect 1.2x1.8 smd: A(-2.9,1) B(2.9,1)
  silkscreen extent -3.2,-1 3.2,1.75, body extent -3,-1.9 3,1.7, height 4.25
BM06BSRSSTBLFSN [mm]
  rect 0.6x1.55 smd: 1(-2.5,1.588) 2(-1.5,1.588) 3(-0.5,1.588) 4(0.5,1.588) 5(1.5,1.588) 6(2.5,1.588)
  rect 1.2x1.8 smd: 7(-3.8,-0.937) 8(3.8,-0.937)
  silkscreen extent -4,-1.59 4,1.31, body extent -4,-1.54 4,2.06, height 4.3
"C 0402" [mm] "MLCC Capacitor 0402"
  rect 0.635x0.6 smd: 1(-0.584,0) 2(0.584,0)
  silkscreen extent -0.76,-0.51 0.76,0.51, body extent -0.76,-0.25 0.74,0.25, height 0.35
"C 0603" [mil]
  rect 38x39.37 smd: 1(-32,0) 2(32,0)
  silkscreen extent -43,-28 47,28, body extent -31,-16 31,16, height 24
"C 0805" [mil]
  rect 45x59.06 smd: 1(-38,0) 2(38,0)
  silkscreen extent -55,-39 55,39, body extent -39,-25 39,25, height 49
"C 1206" [mil]
  rect 60x78.74 smd: 1(-68,0) 2(68,0)
  silkscreen extent -91,-51 89,51, body extent -63,-31 63,31, height 59
CAPPRD250W50D655H1250 [mm]
  rect 1.1x1.1 hole 0.7: 1(0,0)
  round 1.1 hole 0.7: 2(2.5,0)
  silkscreen extent -2.02,-3.27 4.52,3.27, body extent -2.15,-3.4 4.65,3.4, height 12.5
CLSB22B01T [mm]
  rect 1.2x1.4 smd: 1(-2.5,-2.2) 2(0,-2.2) 3(2.5,-2.2) 4(-2.5,2.2) 5(0,2.2) 6(2.5,2.2)
  silkscreen extent -4.25,-1.75 4.25,1.75, body extent -4.25,-2.78 4.25,2.78, height 5.6
"DFN 5x6" [mm]
  rect 0.65x1.2 smd: 1(-1.905,-2.91) 2(-0.635,-2.91) 3(0.635,-2.91) 4(1.905,-2.91)
  rect 4x3 smd: 5_8(0,0.6)
  Top Layer region: -2.4,-1.4 -2.4,3.5 -1.6,3.5 -1.6,2.7 -1,2.7 -1,3.5 -0.3,3.5 -0.3,2.7 0.3,2.7 0.3,3.5 1,3.5 1,2.7 1.6,2.7 1.6,3.5 2.4,3.5 2.4,-1.4
  silkscreen extent -2.5,-4.02 2.7,3.42, body extent -2.5,-3.27 2.5,3.26, height 1.2
ESP32S3WROOM1N16R8 [mm]
  rect 1.5x0.9 smd: 1(-8.75,5.26) 2(-8.75,3.99) 3(-8.75,2.72) 4(-8.75,1.45) 5(-8.75,0.18) 6(-8.75,-1.09) 7(-8.75,-2.36) 8(-8.75,-3.63) 9(-8.75,-4.9) 10(-8.75,-6.17) 11(-8.75,-7.44) 12(-8.75,-8.71) 13(-8.75,-9.98) 14(-8.75,-11.25) 27(8.75,-11.25) 28(8.75,-9.98) 29(8.75,-8.71) 30(8.75,-7.44) 31(8.75,-6.17) 32(8.75,-4.9) 33(8.75,-3.63) 34(8.75,-2.36) 35(8.75,-1.09) 36(8.75,0.18) 37(8.75,1.45) 38(8.75,2.72) 39(8.75,3.99) 40(8.75,5.26)
  rect 0.9x1.5 smd: 15(-6.985,-12.5) 16(-5.715,-12.5) 17(-4.445,-12.5) 18(-3.175,-12.5) 19(-1.905,-12.5) 20(-0.635,-12.5) 21(0.635,-12.5) 22(1.905,-12.5) 23(3.175,-12.5) 24(4.445,-12.5) 25(5.715,-12.5) 26(6.985,-12.5)
  rect 0.9x0.9 smd: 41(-1.5,-2.46) 42(-2.9,-1.06) 43(-2.9,-2.46) 44(-2.9,-3.86) 45(-1.5,-3.86) 46(-0.1,-3.86) 47(-0.1,-2.46) 48(-0.1,-1.06) 49(-1.5,-1.06)
  silkscreen extent -10,5.21 9,12.75, body extent -9,0 9,3.25, height 12.75
FTSH-103-XX-YYY-D [mm]
  round 1.15 hole 0.71: 1(0,0) 2(0,1.27) 3(1.27,0) 4(1.27,1.27) 5(2.54,0) 6(2.54,1.27)
  silkscreen extent -0.64,-1.55 3.17,2.35, body extent -0.66,-1.03 3.15,2.39, height 5.67
HPI0630 [mm] "Power Inductor"
  rect 2.3x3.5 smd: 1(-3,0) 2(3,0)
  silkscreen extent -3.5,-3.5 3.5,3.5, body extent -3.65,-3.35 3.65,3.35, height 2.81
KTIR0711S [mm]
  rect 1x1 smd: 1(-2.15,-0.9) 2(-2.15,0.9) 3(2.15,0.9) 4(2.15,-0.9)
  silkscreen extent -3.1,-1.7 1.35,1.7
"LED 0603 BLUE" [mil]
  rect 38x39.37 smd: 1(-32,0) 2(32,0)
  silkscreen extent -43,-28 63,28, body extent -31,-16 31,16, height 22
LESD5D50CT1G [mm]
  rect 0.48x0.4 smd: 1(-0.66,0) 2(0.66,0)
  silkscreen extent -1.15,-0.4 0.6,0.4, body extent -0.8,-0.4 0.8,0.4, height 0.6
LGA-14_1 [mm]
  rect 0.6x0.3 smd: 1(-1.15,0.75) 2(-1.15,0.25) 3(-1.15,-0.25) 4(-1.15,-0.75) 8(1.15,-0.75) 9(1.15,-0.25) 10(1.15,0.25) 11(1.15,0.75)
  rect 0.3x0.6 smd: 5(-0.5,-0.9) 6(0,-0.9) 7(0.5,-0.9) 12(0.5,0.9) 13(0,0.9) 14(-0.5,0.9)
  silkscreen extent -1.83,0.74 -1.8,0.77, body extent -1.62,-1.25 1.38,1.25, height 0.86
MCSJK7U1600123080B30 [mm]
  rect 1.4x1.2 smd: 1(-1.1,-0.85) 2(1.1,-0.85) 3(1.1,0.85) 4(-1.1,0.85)
  silkscreen extent -1.2,-2.05 -1.1,-1.95, body extent -1.68,-1.33 1.68,1.33, height 0.9
QFP50P1200X1200X160-64N [mm]
  rect 1.475x0.3 smd: 1(-5.738,3.75) 2(-5.738,3.25) 3(-5.738,2.75) 4(-5.738,2.25) 5(-5.738,1.75) 6(-5.738,1.25) 7(-5.738,0.75) 8(-5.738,0.25) 9(-5.738,-0.25) 10(-5.738,-0.75) 11(-5.738,-1.25) 12(-5.738,-1.75) 13(-5.738,-2.25) 14(-5.738,-2.75) 15(-5.738,-3.25) 16(-5.738,-3.75) 33(5.738,-3.75) 34(5.738,-3.25) 35(5.738,-2.75) 36(5.738,-2.25) 37(5.738,-1.75) 38(5.738,-1.25) 39(5.738,-0.75) 40(5.738,-0.25) 41(5.738,0.25) 42(5.738,0.75) 43(5.738,1.25) 44(5.738,1.75) 45(5.738,2.25) 46(5.738,2.75) 47(5.738,3.25) 48(5.738,3.75)
  rect 0.3x1.475 smd: 17(-3.75,-5.738) 18(-3.25,-5.738) 19(-2.75,-5.738) 20(-2.25,-5.738) 21(-1.75,-5.738) 22(-1.25,-5.738) 23(-0.75,-5.738) 24(-0.25,-5.738) 25(0.25,-5.738) 26(0.75,-5.738) 27(1.25,-5.738) 28(1.75,-5.738) 29(2.25,-5.738) 30(2.75,-5.738) 31(3.25,-5.738) 32(3.75,-5.738) 49(3.75,5.738) 50(3.25,5.738) 51(2.75,5.738) 52(2.25,5.738) 53(1.75,5.738) 54(1.25,5.738) 55(0.75,5.738) 56(0.25,5.738) 57(-0.25,5.738) 58(-0.75,5.738) 59(-1.25,5.738) 60(-1.75,5.738) 61(-2.25,5.738) 62(-2.75,5.738) 63(-3.25,5.738) 64(-3.75,5.738)
  silkscreen extent -6.35,-4.65 4.65,4.65, body extent -6,-6 6,6, height 1.6
"R 0402" [mm] "0402 resistor Chip"
  rect 0.635x0.6 smd: 1(-0.584,0) 2(0.584,0)
  silkscreen extent -0.76,-0.51 0.76,0.51, body extent -0.5,-0.25 0.5,0.25, height 0.31
"R 1206" [mil]
  rect 60x78.74 smd: 1(-68,0) 2(68,0)
  silkscreen extent -91,-51 89,51, body extent -75,-32 75,31, height 24
SOD2513X120N [mm]
  rect 1.075x0.5 smd: 1(-1.162,0) 2(1.162,0)
  silkscreen extent -1.7,-0.65 0.85,0.65, body extent -1.25,-0.65 1.25,0.65, height 1.2
SOIC127P600X170-9N [mm]
  rect 1.525x0.65 smd: 1(-2.712,1.905) 2(-2.712,0.635) 3(-2.712,-0.635) 4(-2.712,-1.905) 5(2.712,-1.905) 6(2.712,-0.635) 7(2.712,0.635) 8(2.712,1.905)
  rect 2.71x3.4 smd: 9(0,0)
  silkscreen extent -3.47,2.58 -1.95,2.58, body extent -3,-2.45 3,2.45, height 1.7
SOP65P640X120-14N [mm]
  rect 1.45x0.45 smd: 1(-2.925,1.95) 2(-2.925,1.3) 3(-2.925,0.65) 4(-2.925,0) 5(-2.925,-0.65) 6(-2.925,-1.3) 7(-2.925,-1.95) 8(2.925,-1.95) 9(2.925,-1.3) 10(2.925,-0.65) 11(2.925,0) 12(2.925,0.65) 13(2.925,1.3) 14(2.925,1.95)
  silkscreen extent -3.65,-2.5 1.85,2.52, body extent -3.2,-2.5 3.2,2.5, height 1.2
SOT95P280X145-5N [mm]
  rect 1.2x0.6 smd: 1(-1.25,0.95) 2(-1.25,0) 3(-1.25,-0.95) 4(1.25,-0.95) 5(1.25,0.95)
  silkscreen extent -1.85,-1.45 0.3,1.5, body extent -1.4,-1.45 1.4,1.45, height 1.2
SOT229P700X180-4N [mm]
  rect 1.45x0.95 smd: 1(-3.3,2.29) 2(-3.3,0) 3(-3.3,-2.29)
  rect 1.45x3.25 smd: 4(3.3,0)
  silkscreen extent -4.03,-3.25 1.75,3.25, body extent -3.35,-3.15 3.35,3.15, height 1.8
SOTFL50P160X60-8N [mm]
  rect 0.475x0.3 smd: 1(-0.838,0.75) 2(-0.838,0.25) 3(-0.838,-0.25) 4(-0.838,-0.75) 5(0.838,-0.75) 6(0.838,-0.25) 7(0.838,0.25) 8(0.838,0.75)
  silkscreen extent -1.07,-1.05 0.25,1.15, body extent -0.8,-1.02 0.8,1.08, height 0.6
USB4500030A [mm]
  rect 0.6x1.1 smd: A1(-3.2,4) A4(-2.4,4) A9(2.4,4) A12(3.2,4)
  rect 0.3x1.1 smd: A5(-1.25,4) A6(-0.25,4) A7(0.25,4) A8(1.25,4) B5(1.75,4) B6(0.75,4) B7(-0.75,4) B8(-1.75,4)
  oval 1.92x2.28 hole 1.52: MH1(-5.62,2.85)
  oval 1.9x2.28 hole 1.52: MH2(5.62,2.85)
  oval 1.6x3 hole 1.6: MH3(-5.62,-1.15) MH4(5.62,-1.15)
  silkscreen extent -4.47,-3.25 4.47,5.07, body extent -5.78,-2.95 5.78,4.25, height 2.36
XT30PB [mm]
  round 2.7 hole 1.8: 1(0,0) 2(0,-5)
  silkscreen extent -2.6,-7.6 2.6,2.6, body extent -2.6,-7.6 2.6,2.6, height 10.66